# Altium PCB Memory_SDRAM.PcbDoc
Units mil, origin at the board's own origin, x right, y up, seen from the top; angles counter-clockwise.
Board outline 5200 x 2300 mil, 2 copper layers (Top Layer, Bottom Layer), stack 61.756 mil thick; 13 components, 56 nets, 128 pads, 0 vias.
Unrouted connection lines stored in the file: 65.
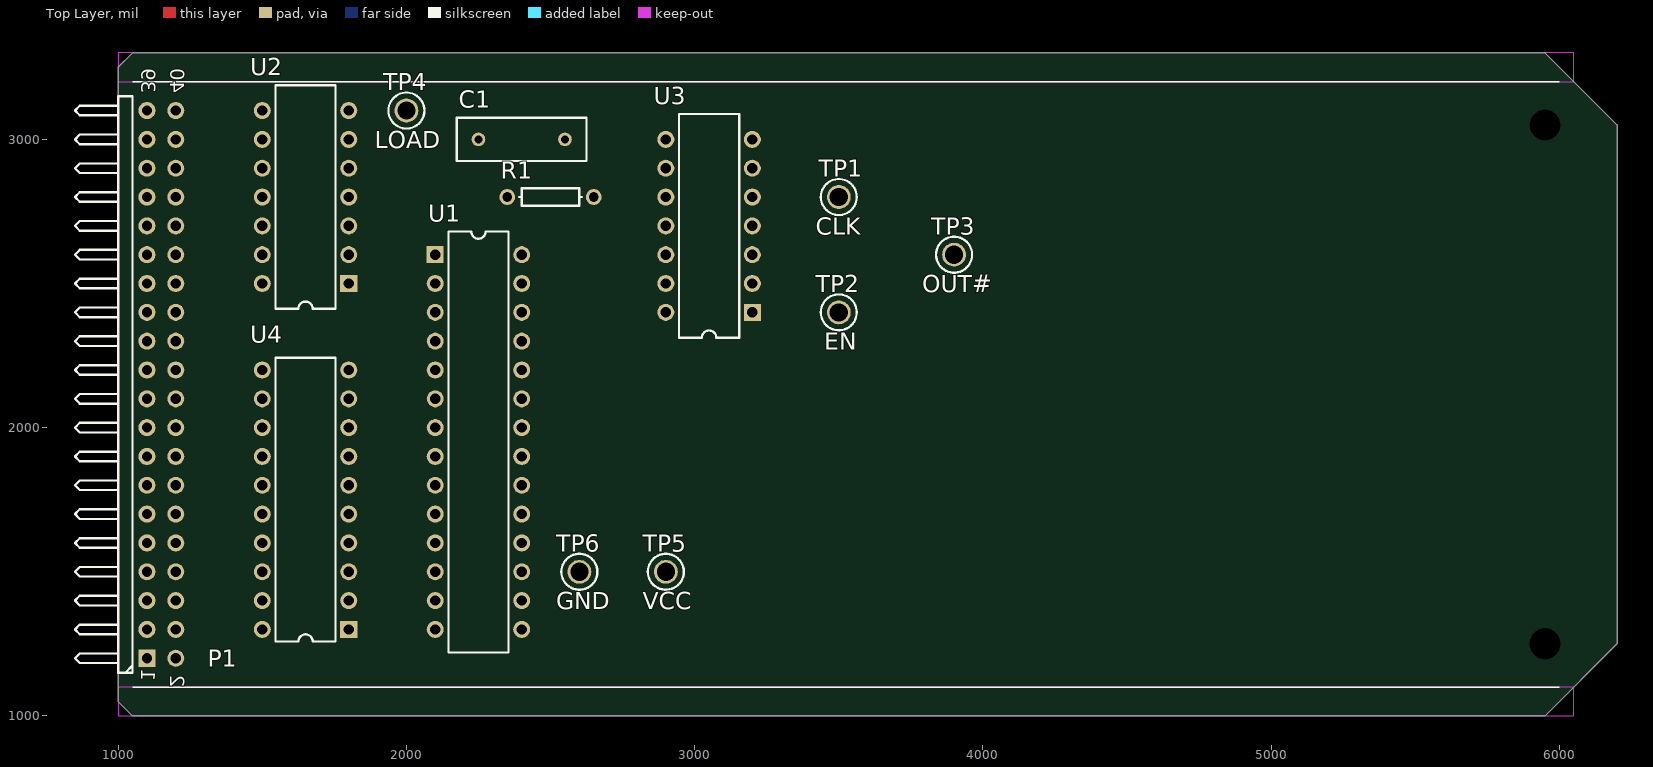
[diagram p0: Top Layer view]
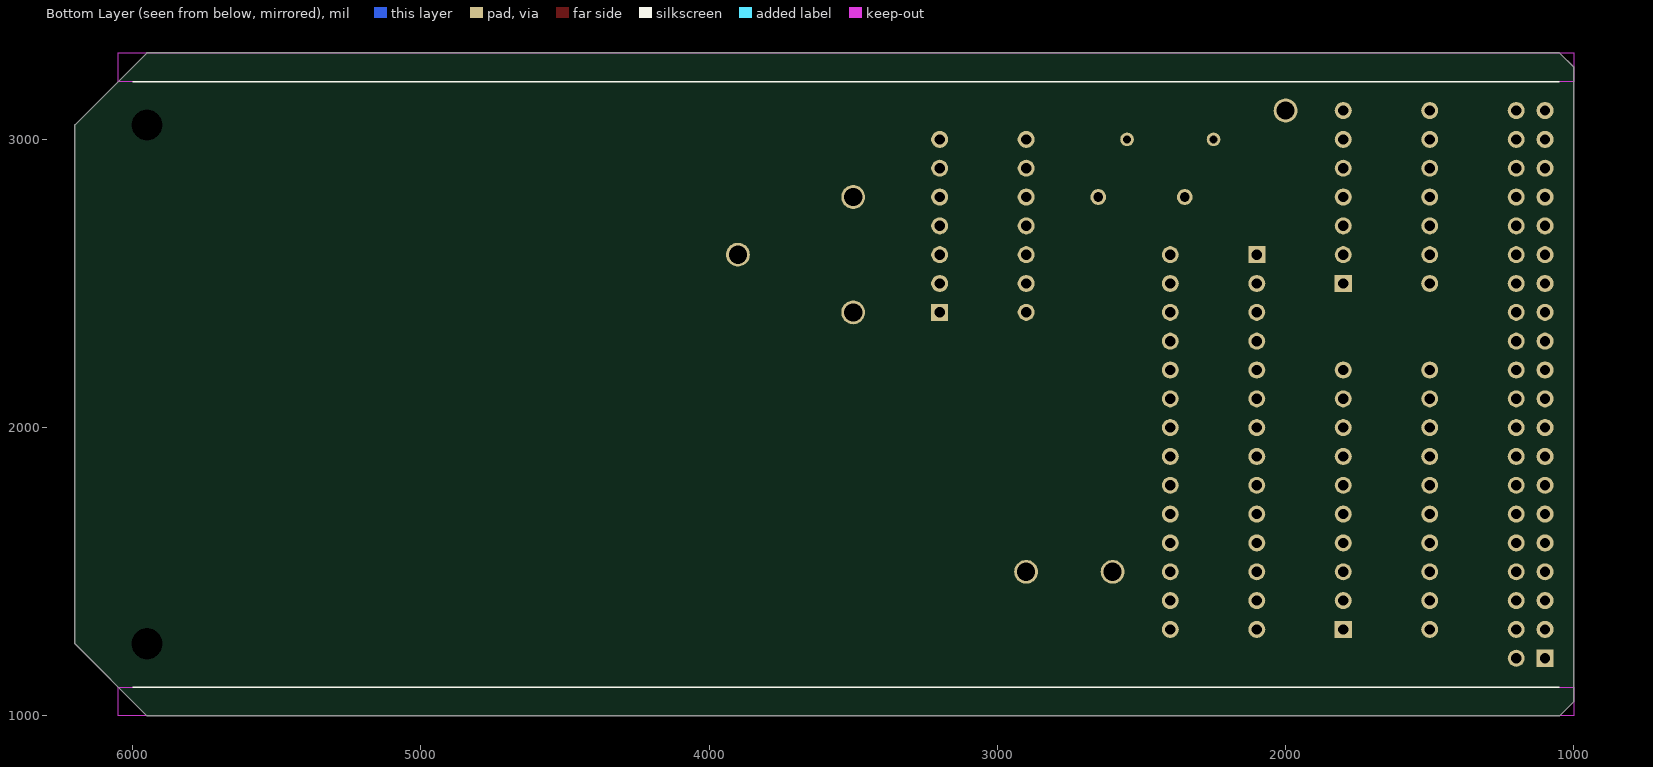
[diagram p1: Bottom Layer view, seen from below]

## Layer stack, top to bottom
Top Solder: solder mask 1, SM-001, Dk 4
Top Layer: signal copper 1.378
Dielectric 1: core 59, Core-043, Dk 4.3
Bottom Layer: signal copper 1.378
Bottom Solder: solder mask 1, SM-001, Dk 4

## Board outline
1000,1050 1050,1000 5950,1000 6200,1250 6200,3050 5950,3300 1050,3300 1000,3250

## Design rules (kind name [scope] priority, off if disabled: settings)
Clearance [All] p1: gap=10 ignorepadtopadclearanceinfootprint=FALSE except(0: Arc-Hole Track-Hole SMDPad-Hole THPad-Hole Via-Hole Fill-Hole Poly-Hole Region-Hole Text-Hole)
PolygonConnect [All] p1: connectstyle=Relief reliefconductorwidth=10 reliefentries=4 polygonreliefangle="90 Angle" airgapwidth=10
RoutingVias [All] p1: holewidth=28 width=50 viastyle="Through Hole" minholewidth=28 minwidth=50 maxholewidth=28 maxwidth=50
SolderMaskExpansion [All] p1: expansion=4 istentingtop=FALSE
Width [All] p1: maxlimit=10 minlimit=10 preferedwidth=10
30 further rules are at their usual default settings.

## Classes and differential pairs
net class ADDR[0..15]: ADDR0 ADDR1 ADDR2 ADDR3 ADDR4 ADDR5 ADDR6 ADDR7 ADDR8 ADDR9 ADDR10 ADDR11 ADDR12 ADDR13 ADDR14 ADDR15
net class BUS[0..7]: BUS0 BUS1 BUS2 BUS3 BUS4 BUS5 BUS6 BUS7
component class Designator: C1 R1 U1 U2 U3 U4
component class Top: P1 TP1 TP2 TP3 TP4 TP5 TP6

## Components (designator, comment, footprint, x,y, rotation, side; value= is the part's Value field where it differs from the comment)
C1 "Cap" RAD-0.3 2400,3000 r0 top value=10nF
P1 "Header 20X2H" HDR2X20H 1100,1200 r90 top
R1 "Res1" AXIAL-0.3 2500,2800 r180 top value=1K
TP1 "CLK" KSTN-5011_V 3500,2800 r0 top
TP2 "EN" KSTN-5011_V 3500,2400 r0 top
TP3 "OUT#" KSTN-5011_V 3900,2600 r0 top
TP4 "LOAD" KSTN-5011_V 2000,3100 r0 top
TP5 "VCC" KSTN-5011_V 2900,1500 r0 top
TP6 "GND" KSTN-5011_V 2600,1500 r0 top
U1 "71256SA20TPG" JT028 2250,1950 r270 top
U2 "SN74LS08N" N014 1650,2800 r90 top
U3 "SN74LS04N" N014 3050,2700 r90 top
U4 "SN74LS245N" N020 1650,1750 r90 top

## Footprints (in the part's own frame and the unit in brackets; to place one, negate y for a bottom-side part, rotate by r counter-clockwise, add the part's x,y. Pads: shape width x height; smd on the part's side, far side on the other; paste and mask are expansions set on the pad)
AXIAL-0.3 [mm] "Axial Device, Thru-Hole; 2 Leads; 0.3 in Pin Spacing"
  round 1.4 hole 0.85: 1(-3.81,0) 2(3.81,0)
  silkscreen extent -2.77,-0.76 2.77,0.76
HDR2X20H [mm] "Connector; Header; 20x2 Position; Right Angle"
  rect 1.5x1.5 hole 0.9: 1(0,0)
  round 1.5 hole 0.9: 2(0,-2.54) 3(2.54,0) 4(2.54,-2.54) 5(5.08,0) 6(5.08,-2.54) 7(7.62,0) 8(7.62,-2.54) 9(10.16,0) 10(10.16,-2.54) 11(12.7,0) 12(12.7,-2.54) 13(15.24,0) 14(15.24,-2.54) 15(17.78,0) 16(17.78,-2.54) 17(20.32,0) 18(20.32,-2.54) 19(22.86,0) 20(22.86,-2.54) 21(25.4,0) 22(25.4,-2.54) 23(27.94,0) 24(27.94,-2.54) 25(30.48,0) 26(30.48,-2.54) 27(33.02,0) 28(33.02,-2.54) 29(35.56,0) 30(35.56,-2.54) 31(38.1,0) 32(38.1,-2.54) 33(40.64,0) 34(40.64,-2.54) 35(43.18,0) 36(43.18,-2.54) 37(45.72,0) 38(45.72,-2.54) 39(48.26,0) 40(48.26,-2.54)
  silkscreen extent -1.27,1.27 49.53,6.35
JT028 [mm] "DIP; 28 Leads; Row Spacing 7.62 mm; Pitch 2.54 mm"
  rect 1.5x1.5 hole 0.9: 1(-16.51,-3.81)
  round 1.5 hole 0.9: 2(-13.97,-3.81) 3(-11.43,-3.81) 4(-8.89,-3.81) 5(-6.35,-3.81) 6(-3.81,-3.81) 7(-1.27,-3.81) 8(1.27,-3.81) 9(3.81,-3.81) 10(6.35,-3.81) 11(8.89,-3.81) 12(11.43,-3.81) 13(13.97,-3.81) 14(16.51,-3.81) 15(16.51,3.81) 16(13.97,3.81) 17(11.43,3.81) 18(8.89,3.81) 19(6.35,3.81) 20(3.81,3.81) 21(1.27,3.81) 22(-1.27,3.81) 23(-3.81,3.81) 24(-6.35,3.81) 25(-8.89,3.81) 26(-11.43,3.81) 27(-13.97,3.81) 28(-16.51,3.81)
  silkscreen extent -18.55,-2.65 18.55,2.65
KSTN-5011_V [mm] "Test Point, Dia 3.17mm"
  round 2.1 hole 1.6: 1(0,0)
  silkscreen extent -1.59,-1.58 1.59,1.58, body extent -1.59,-1.59 1.59,1.59, height 8.13
N014 [mm] "DIP; 14 Leads; Row Spacing 7.62 mm; Pitch 2.54 mm"
  rect 1.5x1.5 hole 0.9: 1(-7.62,-3.81)
  round 1.5 hole 0.9: 2(-5.08,-3.81) 3(-2.54,-3.81) 4(0,-3.81) 5(2.54,-3.81) 6(5.08,-3.81) 7(7.62,-3.81) 8(7.62,3.81) 9(5.08,3.81) 10(2.54,3.81) 11(0,3.81) 12(-2.54,3.81) 13(-5.08,3.81) 14(-7.62,3.81)
  silkscreen extent -9.85,-2.65 9.85,2.65, body extent -9.15,-5.08 9.15,5.12, height 7.88
N020 [mm] "DIP; 20 Leads; Row Spacing 7.62 mm; Pitch 2.54 mm"
  rect 1.5x1.5 hole 0.9: 1(-11.43,-3.81)
  round 1.5 hole 0.9: 2(-8.89,-3.81) 3(-6.35,-3.81) 4(-3.81,-3.81) 5(-1.27,-3.81) 6(1.27,-3.81) 7(3.81,-3.81) 8(6.35,-3.81) 9(8.89,-3.81) 10(11.43,-3.81) 11(11.43,3.81) 12(8.89,3.81) 13(6.35,3.81) 14(3.81,3.81) 15(1.27,3.81) 16(-1.27,3.81) 17(-3.81,3.81) 18(-6.35,3.81) 19(-8.89,3.81) 20(-11.43,3.81)
  silkscreen extent -12.5,-2.65 12.5,2.65, body extent -13.08,-5.08 13.08,5.12, height 7.88
RAD-0.3 [mm] "Radial Cap, Thru-Hole; 2 Leads; 0.3 in Pin Spacing"
  round 1.2 hole 0.7: 1(-3.81,0) 2(3.81,0)
  silkscreen extent -5.71,-1.91 5.71,1.91

## Part data
C1: "Capacitor", LatestRevisionDate=17-Jul-2002, LatestRevisionNote="Re-released for DXP Platform.", PackageDescription="Radial Cap, Thru-Hole; 2 Leads; 0.3 in Pin Spacing", PackageReference=RAD-0.3, Published=8-Jun-2000, Publisher="Altium Limited"
P1: "Header, 20-Pin, Dual row, Right Angle", LatestRevisionDate=17-Jul-2002, LatestRevisionNote="Re-released for DXP Platform.", Publisher="Altium Limited", System=Connector
R1: "Resistor", LatestRevisionDate=17-Jul-2002, LatestRevisionNote="Re-released for DXP Platform.", PackageDescription="Axial Device, Thru-Hole; 2 Leads; 0.3 in Pin Spacing", PackageReference=AXIAL-0.3, Published=8-Jun-2000, Publisher="Altium Limited"
TP1 TP2 TP3 TP4 TP5 TP6: library part TP
U2: "Quadruple 2-Input Positive-AND Gate", ComponentLink1Description="Manufacturer Link", ComponentLink1URL=http://www.ti.com/, ComponentLink2Description=Datasheet, ComponentLink2URL=http://www-s.ti.com/sc/ds/SN74LS08.pdf, DatasheetVersion=Mar-1988, LatestRevisionDate=04-Mar-2005, LatestRevisionNote="Stylized 3D Model Added.", PackageDescription="DIP; 14 Leads; Row Spacing 7.62 mm; Pitch 2.54 mm", PackageReference=N014, PackageVersion=Oct-1995, Published=8-Jun-2000, Publisher="Altium Limited"
U3: "Hex Inverter", ComponentLink1Description="Manufacturer Link", ComponentLink1URL=http://www.ti.com/, ComponentLink2Description=Datasheet, ComponentLink2URL=http://www-s.ti.com/sc/ds/sn74ls04.pdf, DatasheetVersion=Mar-1988, LatestRevisionDate=04-Mar-2005, LatestRevisionNote="Stylized 3D Model Added.", PackageDescription="DIP; 14 Leads; Row Spacing 7.62 mm; Pitch 2.54 mm", PackageReference=N014, PackageVersion=Oct-1995, Published=8-Jun-2000, Publisher="Altium Limited"
U4: "Octal Bus Transceiver with 3-State Outputs", ComponentLink1Description="Manufacturer Link", ComponentLink1URL=http://www.ti.com/, ComponentLink2Description=Datasheet, ComponentLink2URL=http://www-s.ti.com/sc/ds/sn74ls245.pdf, DatasheetVersion=Mar-1988, LatestRevisionDate=04-Mar-2005, LatestRevisionNote="Stylized 3D Model Added.", PackageDescription="DIP; 20 Leads; Row Spacing 7.62 mm; Pitch 2.54 mm", PackageReference=N020, PackageVersion=Oct-1995, Published=8-Jun-2000, Publisher="Altium Limited"

## Free pads (board coordinates)
  round 0 hole 109: ""(5950,1250) ""(5950,3050)

## Nets (pads, with @x,y where several pads share a name; then routed paths per layer and width w, separated by ;. In a path a pad name is that pad's centre, name@x,y a point inside that pad or via, vN(x,y) a via of type N, cw(c..) or ccw(c..) an arc to the next point about the centre after c; other vN are vias at no path point)
ADDR0: P1.6 U1.10
ADDR1: P1.8 U1.9
ADDR2: P1.10 U1.8
ADDR3: P1.12 U1.7
ADDR4: P1.14 U1.6
ADDR5: P1.16 U1.5
ADDR6: P1.18 U1.4
ADDR7: P1.20 U1.3
ADDR8: P1.22 U1.25
ADDR9: P1.24 U1.24
ADDR10: P1.26 U1.21
ADDR11: P1.28 U1.23
ADDR12: P1.30 U1.2
ADDR13: P1.32 U1.26
ADDR14: P1.34
ADDR15: P1.36
ADDR16: P1.38
ADDR17: P1.40
ADDR18: P1.21
ADDR19: P1.23
BUS0: P1.5 U4.18
BUS1: P1.7 U4.17
BUS2: P1.9 U4.16
BUS3: P1.11 U4.15
BUS4: P1.13 U4.14
BUS5: P1.15 U4.13
BUS6: P1.17 U4.12
BUS7: P1.19 U4.11
CLK: P1.37 TP1.1 U3.5
EN: P1.39 TP2.1 U2.2 U2.4 U3.1
GND: P1.3 P1.4 R1.1 TP6.1 U1.1 U1.14 U1.20 U1.22 U2.7 U3.7 U4.10
LOAD: P1.33 TP4.1 U2.1
NetC1_1: C1.1 R1.2 U2.10
NetC1_2: C1.2 U3.8
NetU2_3: U2.3 U2.9
NetU2_5: U2.5 U3.4
NetU2_6: U2.6 U4.1
NetU2_8: U2.8 U3.11
NetU3_2: U3.2 U4.19
NetU3_6: U3.6 U3.9
O\U\T\: P1.31
OUT#: TP3.1 U3.3
REG0: U1.11 U4.2
REG1: U1.12 U4.3
REG2: U1.13 U4.4
REG3: U1.15 U4.5
REG4: U1.16 U4.6
REG5: U1.17 U4.7
REG6: U1.18 U4.8
REG7: U1.19 U4.9
RFU_M25: P1.25
RFU_M27: P1.27
RFU_M29: P1.29
RST: P1.35
VCC: P1.1 P1.2 TP5.1 U1.28 U2.14 U3.14 U4.20
WE#: U1.27 U3.10
pads on no net: U2.11 U2.12 U2.13 U3.12 U3.13

## Keep-outs
Top Layer:
  rectangle: 1000,3200 6050,3300
  rectangle: 1000,1000 6050,1100
Bottom Layer:
  rectangle: 1000,3200 6050,3300
  rectangle: 1000,1000 6050,1100

## Silkscreen, mask and mechanical layers (free items; w line width, h text height)
Top Overlay:
  lines w5: 1050,1100 6000,1100 ; 1050,3200 6000,3200
Bottom Overlay:
  lines w5: 1050,1100 6000,1100 ; 1050,3200 6000,3200

## Text inside footprints (layer, text, board x,y; h text height)
P1: Top Overlay "2" at 1180,1100 h50 r270; Top Overlay "1" at 1080,1120 h50 r270; Top Overlay "39" at 1080,3160 h50 r270; Top Overlay "40" at 1180,3160 h50 r270